# Altium PCB PFCv24.02.PcbDoc
Units mil, origin at the board's own origin, x right, y up, seen from the top; angles counter-clockwise.
Board outline 3770 x 1300 mil, 4 copper layers (Top Layer, Internal Plane 1, Internal Plane 2, Bottom Layer); 95 components, 75 nets, 406 pads, 184 vias.
Unrouted connection lines stored in the file: 1.
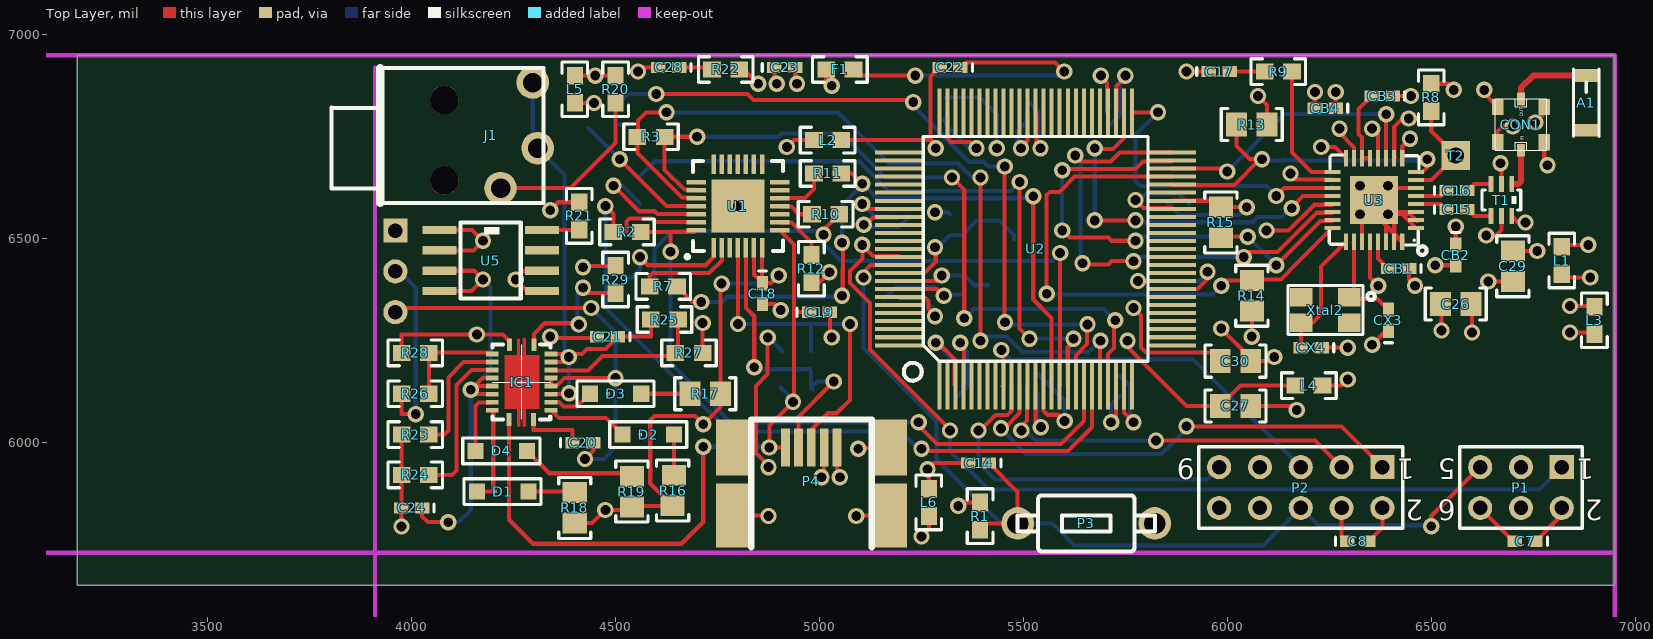
[diagram p0: Top Layer view]
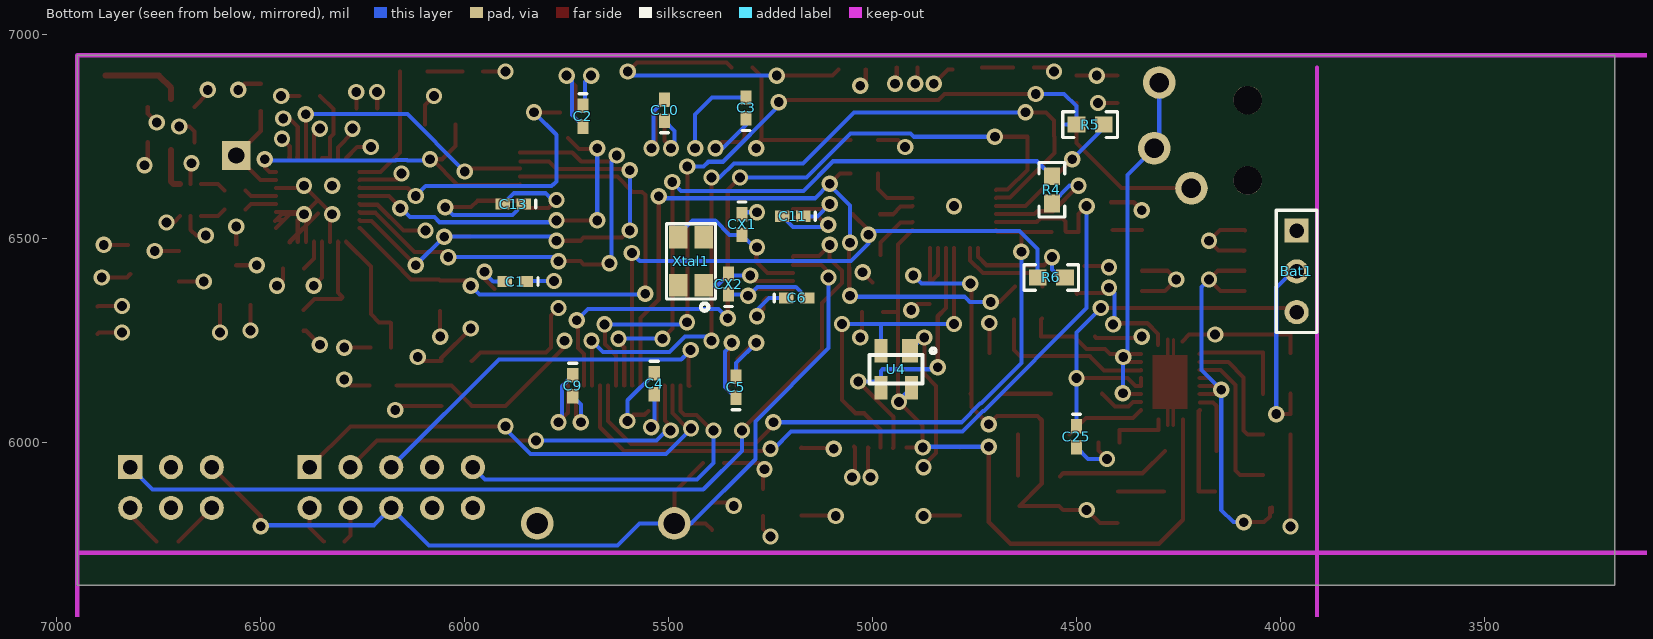
[diagram p1: Bottom Layer view, seen from below]
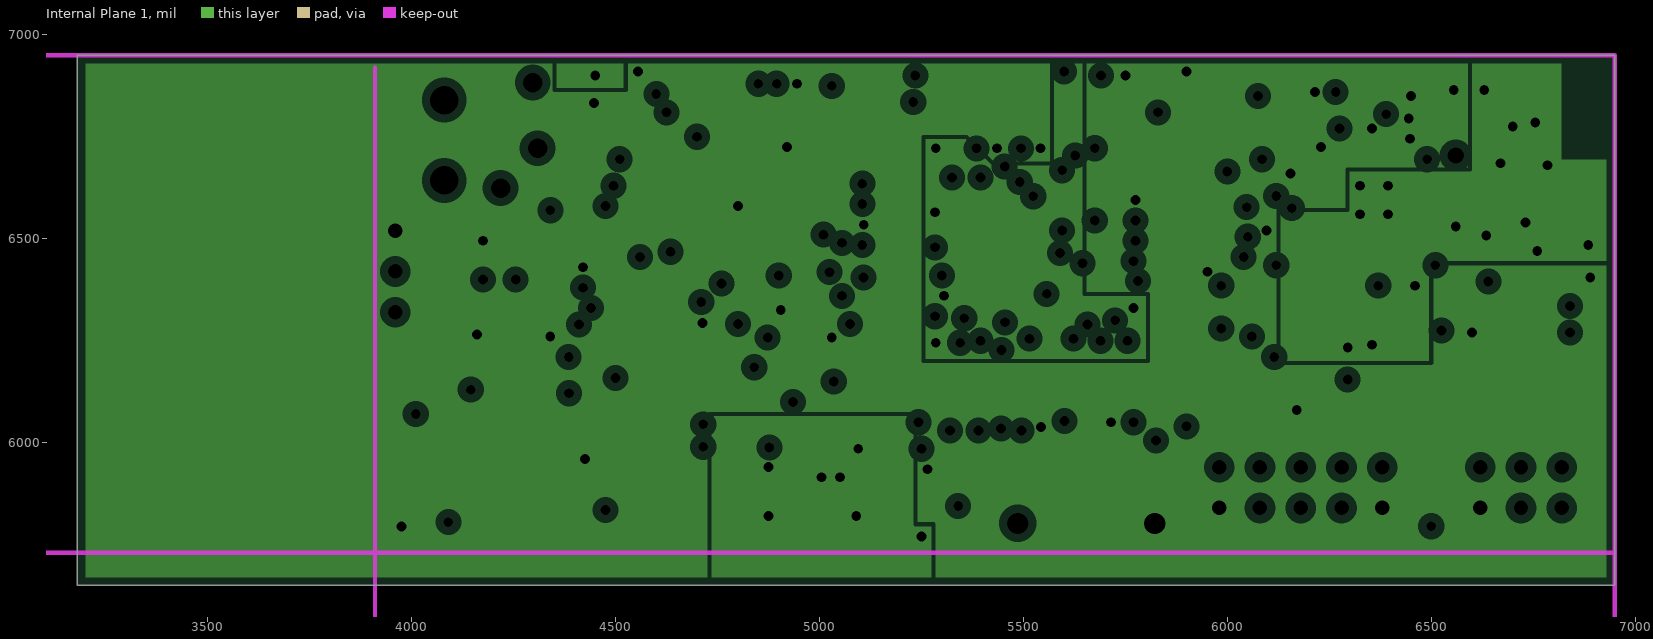
[diagram p2: Internal Plane 1, clearances drawn from the general rule]
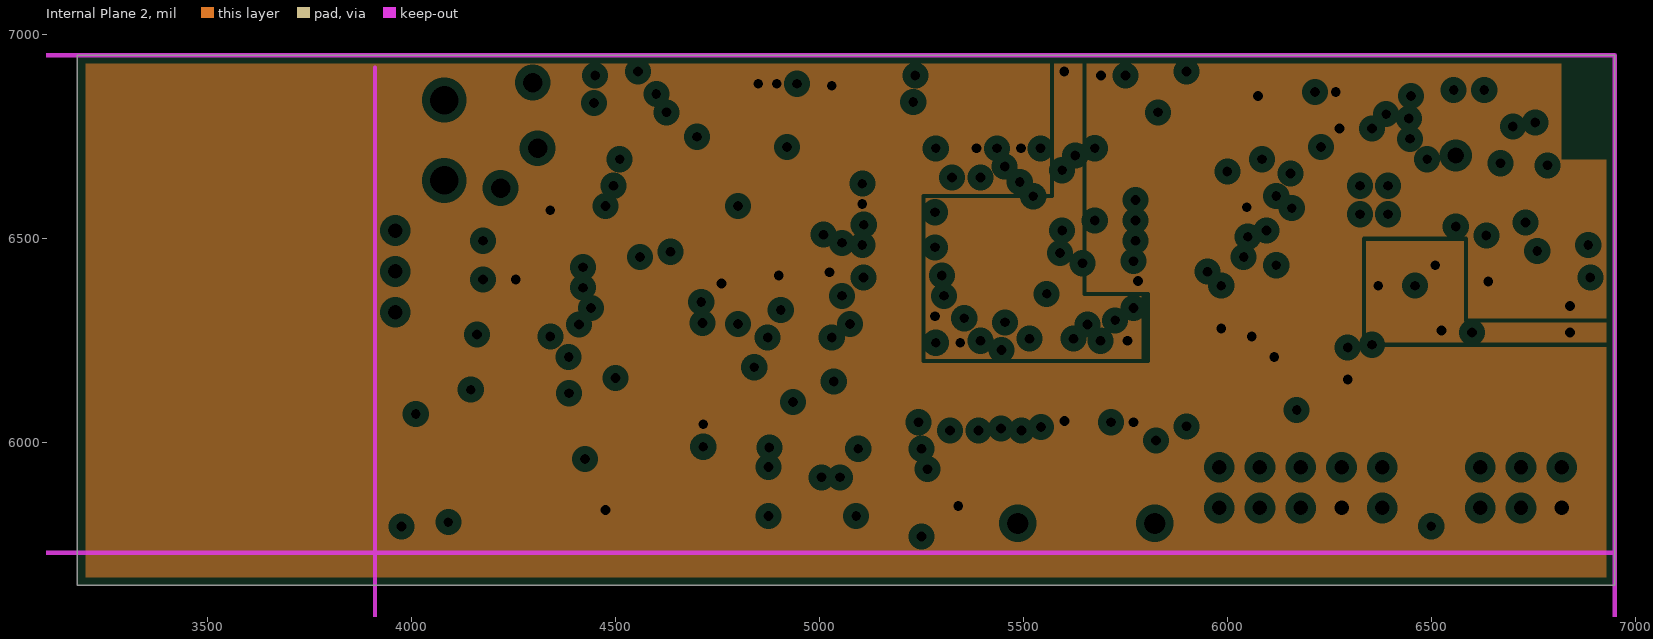
[diagram p3: Internal Plane 2, clearances drawn from the general rule]

## Layer stack, top to bottom
Top Layer: signal copper 1.4
Dielectric: core 12.6, FR-4, Dk 4.8
Internal Plane 1: plane copper 1.4, net (Multiple Nets)
Dielectric: prepreg 12.6, FR-4, Dk 4.8
Internal Plane 2: plane copper 1.4, net (Multiple Nets)
Dielectric: core 12.6, FR-4, Dk 4.8
Bottom Layer: signal copper 1.4

## Board outline
6950,5650 3180,5650 3180,6950 6950,6950 6950,5650

## Design rules (kind name [scope] priority, off if disabled: settings)
Clearance [All] p1: gap=7.87
ComponentClearance [All] p1: gap=10 collisioncheckmode=3 verticalgap=10 showdistances=TRUE
MinimumSolderMaskSliver [All] p1 off: minsoldermaskwidth=3.94
PlaneClearance [All] p1: clearance=20
PlaneConnect [All] p1: planeconnectstyle=Direct reliefexpansion=20 reliefentries=4 reliefconductorwidth=10 reliefairgap=10
PolygonConnect [All] p1: connectstyle=Direct reliefconductorwidth=10 reliefentries=4 polygonreliefangle="90 Angle"
RoutingVias [All] p1: holewidth=15.75 width=35.43 viastyle="Through Hole" minholewidth=15.75 minwidth=35.43 maxholewidth=393.7 maxwidth=393.7
SilkToSilkClearance [All] p1 off: silktosilkclearance=10
SilkscreenOverComponentPads [All] p1 off: minsilkscreentomaskgap=10
SolderMaskExpansion [All] p1: expansion=4
TestPointUsage [All] p1: valid=0 allowmultiple=FALSE
Testpoint [All] p1: side=15 testpointundercomponent=TRUE minsize=40 maxsize=100 preferedsize=60 minholesize=0 maxholesize=40 preferedholesize=32 testpointgrid=1 style=1023 order=0-112345678
Width [All] p1: maxlimit=393.7 minlimit=7.87 preferedwidth=7.87
18 further rules are at their usual default settings.

## Components (designator, comment, footprint, x,y, rotation, side; value= is the part's Value field where it differs from the comment)
A1 "Ant. 2.45G" "ANTENNA CHIP" 6880,6900 r270 top
Bat1 "Batttery" HDR1X3 3960,6520 r270 bottom
C1 "C" 0402 5875.59,6395 r0 bottom
C2 "C" 0402 5710,6800.59 r270 bottom
C3 "C" 0402 5310,6820.59 r90 bottom
C4 "C" 0402 5535,6144.41 r270 bottom
C5 "C" 0402 5335,6135.59 r90 bottom
C6 "C" 0402 5185.59,6355 r180 bottom
C7 "C" 0402 6730,5758 r180 top
C8 "C" 0402 6320,5758 r0 top
C9 "C" 0402 5735,6139.41 r270 bottom
C10 "C" 0402 5510,6815 r90 bottom
C11 "C" 0402 5195.59,6555 r0 bottom
C13 "C" 0402 5880.59,6585 r0 bottom
C14 "C" 0402 5390,5950 r180 top
C15 "C" 0402 6563,6572 r0 top
C16 "C" 0402 6563,6618 r0 top
C17 "C" 0402 5980,6910 r0 top
C18 "C" 0402 4860,6365.59 r270 top
C19 "C" 0402 5000,6320 r0 top
C20 "C" 0402 4420,6000 r0 top
C21 "C" 0402 4480,6260 r180 top
C22 "C" 0402 5320,6920 r180 top
C23 "C" 0402 4915,6920 r0 top
C24 "C" 0402 4000,5840 r180 top
C25 "C" 0402 4500,6014.41 r270 bottom
C26 "100nF_0805" 0805#1 6560,6340 r180 top
C27 "100nF_0805" 0805#1 6020,6090 r180 top
C28 "C" 0402 4630,6920 r180 top
C29 "100nF_0805" 0805#1 6700,6432.6 r270 top
C30 "100nF_0805" 0805#1 6020,6200 r0 top
CB1 "C" 0402 6420,6427 r180 top
CB2 "C" 0402 6560,6460 r270 top
CB3 "C" 0402 6380,6850 r180 top
CB4 "C" 0402 6240,6820 r180 top
CON1 "Conector Antena" "MM8430-2600_Coaxial Connectors" 6720,6780 r90 top
CX1 "C" 0402 5320,6535 r270 bottom
CX2 "C" 0402 5353,6389 r90 bottom
CX3 "C" 0402 6395,6300 r90 top
CX4 "C" 0402 6205.59,6233 r180 top
D1 "Diodo Led" "Diode Led" 4222.99,5880 r180 top
D2 "Diodo Led" "Diode Led" 4580,6020 r180 top
D3 "Diodo Led" "Diode Led" 4500,6120 r180 top
D4 "Diodo Led" "Diode Led" 4220,5980 r180 top
F1 "Ferrita" 0603 5050,6915 r0 top
IC1 "BQ24031" BQ24031 4262.44,6042.36 r90 top
J1 "CAMSHOT" MJ-2509N 3923,6722 r270 top
L1 "22nH_0603" 0603 6820,6446.54 r270 top
L2 "22nH_0603" 0603 5020,6742 r180 top
L3 "22nH_0603" 0603 6900,6300 r270 top
L4 "22nH_0603" 0603 6200,6140 r180 top
L5 "22nH_0603" 0603 4400,6866.54 r270 top
L6 "22nH_0603" 0603 5268,5853.46 r90 top
P1 "Programador" HDR2X3 6820,5940 r180 top
P2 "Programador" HDR2X5 6380,5940 r180 top
P3 "Pulsador" PUSH-BUTTON-W 5486,5802 r0 top
P4 "USB-AB" USB-MINI-AB-SMT 4980,5988 r90 top
R1 "R 0402" 0603 5394,5820 r90 top
R2 "R 0402" 0603 4528,6517 r180 top
R3 "R 0402" 0603 4587,6750 r180 top
R4 "R 0402" 0603 4560,6620 r90 bottom
R5 "R 0402" 0603 4466.54,6780 r0 bottom
R6 "R 0402" 0603 4561.54,6405 r0 bottom
R7 "R 0402" 0603 4617,6383 r0 top
R8 "R 0402" 0603 6500,6846.54 r90 top
R9 "R 0402" 0603 6125,6910 r180 top
R10 "R 0402" 0603 5015,6560 r180 top
R11 "R 0402" 0603 5020,6660 r180 top
R12 "R 0402" 0603 4980,6426.54 r90 top
R13 "16.9kohm-0805" 0805#1 6060,6780 r0 top
R14 "16.9kohm-0805" 0805#1 6060,6360 r270 top
R15 "16.9kohm-0805" 0805#1 5984,6540 r90 top
R16 "16.9kohm-0805" 0805#2 4640,5882.6 r270 top
R17 "16.9kohm-0805" 0805#1 4720,6120 r0 top
R18 "16.9kohm-0805" 0805#1 4400,5840 r270 top
R19 "16.9kohm-0805" 0805#1 4540,5880 r270 top
R20 "R 0402" 0603 4500,6866.54 r90 top
R21 "R 0402" 0603 4411,6556 r90 top
R22 "R 0402" 0603 4770,6915 r0 top
R23 "R 0402" 0603 4008.78,6020 r180 top
R24 "R 0402" 0603 4008.79,5920.89 r180 top
R25 "R 0402" 0603 4620,6302 r180 top
R26 "R 0402" 0603 4008.78,6120 r0 top
R27 "R 0402" 0603 4680,6220 r180 top
R28 "R 0402" 0603 4008.78,6220 r0 top
R29 "R 0402" 0603 4500,6400 r270 top
T1 "BALUN" BALUN 6672,6595 r270 top
T2 "TESTPOINT" TESTPOINT 6560,6704 r0 top
U1 "USB" QFN28_5X5 4800,6580 r90 top
U2 "XMEGA" Quad100 5530,6475 r90 top
U3 "RF TRAN" QFN32_50 6360,6595 r90 top
U4 "TVS" SOT-143 4942,6180 r0 bottom
U5 "TPS77633D" TPS77633D 4120,6540 r270 top
Xtal1 "Xtal TSX-4025" TSX-4025 5445,6445 r90 bottom
Xtal2 "Xtal TSX-4025" TSX-4025 6240,6325 r180 top

## Footprints (in the part's own frame and the unit in brackets; to place one, negate y for a bottom-side part, rotate by r counter-clockwise, add the part's x,y. Pads: shape width x height; smd on the part's side, far side on the other; paste and mask are expansions set on the pad)
0402 [mm] "Chip Capacitor; Body 1.0 x 0.5 mm (LxW typ)"
  rect 0.9x0.7 smd: 1(-0.65,0) 2(0.65,0)
  silkscreen extent -1.4,-0.25 -1.4,0.25
0603 [mm]
  rect 1.1x1 smd: 1(-0.85,0) 2(0.85,0)
  silkscreen extent -1.7,-0.8 1.7,0.8
0805#1 [mm] "Chip Resistor; Body 2.0 x 1.3 mm (LxW typ)"
  rect 1.3x1.5 smd: 1(-0.95,0) 2(0.95,0)
  silkscreen extent -1.9,-1 1.9,1
0805#2 [mm] "Chip Resistor; Body 2.0 x 1.3 mm (LxW typ)"
  rect 1.3x1.5 smd: 1(-0.95,0.076) 2(0.95,0)
  silkscreen extent -1.9,-1 1.9,1
"ANTENNA CHIP" [mm] "ANTENNA CHIP 2.4GHZ"
  rect 0.8x1.6 smd: 1(0,0) 2(3.4,0)
  silkscreen extent -0.4,-0.8 3.8,0.8
BALUN [mm] "FILTER BALUN CER CHIP 2.4GHZ"
  rect 1x0.3 smd: 1(-1,0.65) 2(-1,0) 3(-1,-0.65) 4(1,-0.65) 5(1,0) 6(1,0.65)
  silkscreen extent -0.62,-1.2 0.62,1.2
BQ24031 [mm]
  rect 0.8x0.3 smd: 1(0.37,-0.93) 10(5.02,-0.955) 11(5.02,0.57) 20(0.37,0.595)
  rect 0.3x0.8 smd: 2(0.945,-2.005) 3(1.445,-2.005) 4(1.945,-2.005) 5(2.445,-2.005) 6(2.945,-2.005) 7(3.445,-2.005) 8(3.945,-2.005) 9(4.445,-2.005) 12(4.445,1.645) 13(3.945,1.645) 14(3.445,1.645) 15(2.945,1.645) 16(2.445,1.645) 17(1.945,1.645) 18(1.445,1.645) 19(0.945,1.645)
  Top Layer region: 1.015,-1.299 4.39,-1.299 4.39,0.881 1.015,0.881
  Top Layer lines w0.2: 5.355,0.005 0,0 ; 0,-0.35 5.375,-0.35
  silkscreen extent 0.37,-2 5.03,1.65
"Diode Led" [mm]
  rect 1x1 smd: 1(-1.6,0) 2(1.6,0)
  silkscreen extent -2.4,-0.8 2.4,0.8
HDR1X3 [mm] "Connector; Header; 3 Position"
  rect 1.5x1.5 hole 0.9: 1(0,0)
  round 1.5 hole 0.9: 2(2.54,0) 3(5.08,0)
  silkscreen extent -1.27,-1.27 6.35,1.27
HDR2X3 [mm] "Connector; Header; 3x2 Position"
  rect 1.5x1.5 hole 0.9: 1(0,0)
  round 1.5 hole 0.9: 2(0,2.54) 3(2.54,0) 4(2.54,2.54) 5(5.08,0) 6(5.08,2.54)
  silkscreen extent -1.27,-1.27 6.35,3.81
HDR2X5 [mm] "Connector; Header; 5x2 Position"
  rect 1.5x1.5 hole 0.9: 1(0,0)
  round 1.5 hole 0.9: 2(0,2.54) 3(2.54,0) 4(2.54,2.54) 5(5.08,0) 6(5.08,2.54) 7(7.62,0) 8(7.62,2.54) 9(10.16,0) 10(10.16,2.54)
  silkscreen extent -1.27,-1.27 11.43,3.81
MJ-2509N [mil] "CONN MONO JACK 2.5MM PCB MNT"
  round 80 hole 48: 1(98,295) 2(0,386) 3(-161,374)
  round 70 hole 70: NC(-118,157) NC(79,157)
  silkscreen extent -197,-120 134,400
"MM8430-2600_Coaxial Connectors" [mm]
  rect 0.8x0.5 smd: 1(-1.6,0) 2(1.6,0)
  rect 1x0.7 smd: 3(-1.1,1.45) 4(1.1,1.45) 5(-1.102,-1.45) 6(1.1,-1.45)
  silkscreen extent -1.6,-1.6 1.6,1.6
PUSH-BUTTON-W [mil] "SWITCH TACT 6X3.5MM H=4.3MM"
  round 80 hole 52: 1(0,0) 2(336.22,0)
  silkscreen extent 0,-69 336,69
QFN28_5X5 [mm] "QFN para SiLab CP2102"
  rect 3.3x3.3 smd: 0(0,0)
  rect 1.2x0.28 smd: 1(-2.6,1.5) 2(-2.6,1) 3(-2.6,0.5) 4(-2.6,0) 5(-2.6,-0.5) 6(-2.6,-1) 7(-2.6,-1.5) 15(2.6,-1.5) 16(2.6,-1) 17(2.6,-0.5) 18(2.6,0) 19(2.6,0.5) 20(2.6,1) 21(2.6,1.5)
  rect 0.28x1.2 smd: 8(-1.5,-2.6) 9(-1,-2.6) 10(-0.5,-2.6) 11(0,-2.6) 12(0.5,-2.6) 13(1,-2.6) 14(1.5,-2.6) 22(1.5,2.6) 23(1,2.6) 24(0.5,2.6) 25(0,2.6) 26(-0.5,2.6) 27(-1,2.6) 28(-1.5,2.6)
  silkscreen extent -3.25,-2.8 2.8,3.25
QFN32_50 [mm] "QFN32"
  rect 0.25x1 smd: 1(-1.75,-2.6) 2(-1.25,-2.6) 3(-0.75,-2.6) 4(-0.25,-2.6) 5(0.25,-2.6) 6(0.75,-2.6) 7(1.25,-2.6) 8(1.75,-2.6) 17(1.75,2.6) 18(1.25,2.6) 19(0.75,2.6) 20(0.25,2.6) 21(-0.25,2.6) 22(-0.75,2.6) 23(-1.25,2.6) 24(-1.75,2.6)
  rect 1x0.25 smd: 9(2.6,-1.75) 10(2.6,-1.25) 11(2.6,-0.75) 12(2.6,-0.25) 13(2.6,0.25) 14(2.6,0.75) 15(2.6,1.25) 16(2.6,1.75) 25(-2.6,1.75) 26(-2.6,1.25) 27(-2.6,0.75) 28(-2.6,0.25) 29(-2.6,-0.25) 30(-2.6,-0.75) 31(-2.6,-1.25) 32(-2.6,-1.75)
  rect 3x3 smd: 33(0,0)
  silkscreen extent -3.42,-3.27 2.8,2.8
Quad100 [mm]
  rect 3x0.25 smd: 1(-8.5,6) 2(-8.5,5.5) 3(-8.5,5) 4(-8.5,4.5) 5(-8.5,4) 6(-8.5,3.5) 7(-8.5,3) 8(-8.5,2.5) 9(-8.5,2) 10(-8.5,1.5) 11(-8.5,1) 12(-8.5,0.5) 13(-8.5,0) 14(-8.5,-0.5) 15(-8.5,-1) 16(-8.5,-1.5) 17(-8.5,-2) 18(-8.5,-2.5) 19(-8.5,-3) 20(-8.5,-3.5) 21(-8.5,-4) 22(-8.5,-4.5) 23(-8.5,-5) 24(-8.5,-5.5) 25(-8.5,-6) 51(8.5,-6) 52(8.5,-5.5) 53(8.5,-5) 54(8.5,-4.5) 55(8.5,-4) 56(8.5,-3.5) 57(8.5,-3) 58(8.5,-2.5) 59(8.5,-2) 60(8.5,-1.5) 61(8.5,-1) 62(8.5,-0.5) 63(8.5,0) 64(8.5,0.5) 65(8.5,1) 66(8.5,1.5) 67(8.5,2) 68(8.5,2.5) 69(8.5,3) 70(8.5,3.5) 71(8.5,4) 72(8.5,4.5) 73(8.5,5) 74(8.5,5.5) 75(8.5,6)
  rect 0.25x3 smd: 26(-6,-8.5) 27(-5.5,-8.5) 28(-5,-8.5) 29(-4.5,-8.5) 30(-4,-8.5) 31(-3.5,-8.5) 32(-3,-8.5) 33(-2.5,-8.5) 34(-2,-8.5) 35(-1.5,-8.5) 36(-1,-8.5) 37(-0.5,-8.5) 38(0,-8.5) 39(0.5,-8.5) 40(1,-8.5) 41(1.5,-8.5) 42(2,-8.5) 43(2.5,-8.5) 44(3,-8.5) 45(3.5,-8.5) 46(4,-8.5) 47(4.5,-8.5) 48(5,-8.5) 49(5.5,-8.5) 50(6,-8.5) 76(6,8.5) 77(5.5,8.5) 78(5,8.5) 79(4.5,8.5) 80(4,8.5) 81(3.5,8.5) 82(3,8.5) 83(2.5,8.5) 84(2,8.5) 85(1.5,8.5) 86(1,8.5) 87(0.5,8.5) 88(0,8.5) 89(-0.5,8.5) 90(-1,8.5) 91(-1.5,8.5) 92(-2,8.5) 93(-2.5,8.5) 94(-3,8.5) 95(-3.5,8.5) 96(-4,8.5) 97(-4.5,8.5) 98(-5,8.5) 99(-5.5,8.5) 100(-6,8.5)
  silkscreen extent -8.21,-7 7,8.21
SOT-143 [mm] "SOT143"
  rect 1x1.45 smd: 1(-0.85,-1.15)
  rect 0.8x1.45 smd: 2(0.95,-1.15) 3(0.95,1.15) 4(-0.95,1.15)
  silkscreen extent -2.45,-1.3 1.65,0.9
TESTPOINT [mm] "Punto de test"
  rect 1.8x1.8 hole 1: 1(0,0)
TPS77633D [mm]
  rect 0.51x2.116 smd: 1(0.467,-1.312) 2(1.737,-1.312) 3(3.007,-1.312) 4(4.277,-1.312) 5(4.277,5.058) 6(3.007,5.058) 7(1.737,5.058) 8(0.467,5.058)
  silkscreen extent 0,0 4.75,3.75
TSX-4025 [mm] "Xtal 16Mhz"
  rect 1.4x1.15 smd: 1(-1.5,-0.8) 2(1.5,-0.8) 3(1.5,0.8) 4(-1.5,0.8)
  silkscreen extent -3.09,-1.52 2.33,1.53
USB-MINI-AB-SMT [mm] "Conector MINI-USB-AB-SMT"
  rect 2.35x0.55 smd: D+(0,0) D-(0,0.8) ID(0,-0.8) UGND(0,-1.6) VBUS(0,1.6)
  rect 4x2.05 smd: shield(-4.225,-4.925) shield(-4.225,4.925)
  rect 3.5x2.05 smd: shield(0,4.925) shield(0,-4.925)
  silkscreen extent -6.2,-3.75 1.75,3.75

## Part data
A1: library part 2450AT18A100, "ANTENNA CHIP 2.4GHZ"
Bat1: library part "Header 3", "Header, 3-Pin"
C1 C2 C3 C4 C5 C6 C7 C8 C9 C10 C11 C13 C14 C15 C16 C17 C18 C19 C20 C21 C22 C23 C24 C25 C28 CB1 CB2 CB3 CB4 CX1 CX2 CX3 CX4: "CONDENSADOR"
C26 C27 C29 C30: "CAP CER 100PF 630V X7R 0805"
CON1: library part "CON ANT-MM8430-2600RA1", "CONN MW COAXIAL WITH SWITCH"
D1 D2 D3 D4: library part LTST-C230CKT, "Typical INFRARED GaAs LED"
F1: library part BLM21AH102SN1, "Chip Ferrite Beads"
IC1: "IC PWR MANAGEMENT SYSTEM 20-QFN"
J1: library part MJ-2509N_1, "CONN MONO JACK 2.5MM PCB MNT"
L1 L2 L3 L4 L5 L6: "CER INDUCTOR 22NH 0603"
P1: library part "Header 3X2", "Header, 3-Pin, Dual row"
P2: library part "Header 5X2", "Header, 5-Pin, Dual row"
P3: library part PUSHBUTTON, "SWITCH TACT 6X3.5MM H=4.3MM 180G"
P4: library part WM1722, "CONN RECEPT USB 5POS RT ANG SMD"
R1 R2 R3 R4 R5 R6 R7 R8 R9 R10 R11 R12 R20 R21 R22 R23 R24 R25 R26 R27 R28 R29: "RESISTENCIA 0402 SMD"
R13 R14 R15 R16 R17 R18 R19: "RES 16.9K OHM 1/8W 1% 0805 SMD"
T1: library part 2450FB39B100E, "FILTER BALUN CER CHIP 2.4GHZ"
T2: "Punto de Test"
U1: library part CP2102, "IC USB-TO-UART BRIDGE 28MLP"
U2: library part ATXMEGA64A1, "MCU AVR 64K FLASH 1.6V 100-TQFP"
U3: library part AT86RF231, "IC TXRX ZIGBEE/802.15.4 32QFN"
U4: library part SP0503BAHTG, "TVS AVAL DIODE ARRAY 3 CH SOT143"
U5: "IC 3.3V 500MA LDO REG 8-SOIC"
Xtal1 Xtal2: "Cristal 16Mhz"

## Via types
v1: diameter 40, hole 24, Top Layer to Bottom Layer, 183 vias
v2: diameter 40, hole 24, Top Layer to Bottom Layer, tented bottom, 1 vias

## Nets (pads, with @x,y where several pads share a name; then routed paths per layer and width w, separated by ;. In a path a pad name is that pad's centre, name@x,y a point inside that pad or via, vN(x,y) a via of type N, cw(c..) or ccw(c..) an arc to the next point about the centre after c; other vN are vias at no path point)
A-GND: C5.2 C6.2 C22.2 C30.1 CX1.1 CX2.1 L2.1 U2.3 U2.93 | length 1344.6
  Top Layer w10: L2.1 5269.13,6742 ; U2.93 5288.41,6376.59 v1(5305,6360) ; v1(5285,6721.65) 5285,6732.13 5272.13,6745 5272.13,6897.72 C22.2 ; v1@5291.01,6245 5331.27,6204.74 5331.27,6142.24 U2.3 ; v1(5770,6330) 5787.87,6312.13 5787.87,6233.38 5800.26,6221 5961.6,6221 C30.1
  Bottom Layer w10: C6.2 C6.2@5165,6360 ; C6.2@5161.48,6355 5188.13,6381.65 5281.86,6381.65 v1@5303.51,6360 ; v1(5283,6565) 5315.59,6565 CX1.1 ; v1(5285,6245) 5335,6195 C5.2 ; v1(5305,6360) v1@5303.51,6360 ; CX2.1 5306.92,6363.41 v1@5303.51,6360
A-VCC: C5.1 C6.1 C22.1 C27.2 F1.2 L4.2 U2.4 U2.94 | length 1745.7
  Top Layer w10: F1.2 5098.46,6900 v1(5235,6900) ; U2.94@5197.24,6355.01 5259.74,6355.01 5267.28,6347.47 5267.28,6327.72 v1@5285,6310 ; C22.1 5357.72,6932.13 5577.87,6932.13 v1(5600,6910) ; U2.4 5354.73,6142.24 v1@5354.73,6230 ; v1(5755,6250) 5755,6235 5900,6090 C27.2 6032.6,6140 L4.2
  Bottom Layer w10: C6.1 5254.16,6355 5285,6324.16 v1@5285,6310 ; v1(5235,6900) 5590,6900 v1(5600,6910) ; C5.1 5361.65,6136.65 5361.65,6223.35 v1@5355,6230
  other v1: 5345,6245 5283,6310
D+: P4.D+ U1.4 U4.2 | length 866.5
  Top Layer w10: v1(4800,6291) U1.4 ; P4.D+ 4980,6031.8 5020.33,6072.13 5042.13,6072.13 5075,6105 v1@5075,6275
  Bottom Layer w10: v1(4800,6291) 4979.4,6291 ; U4.2 4979.4,6291 ; v1(5075,6291) 4979.4,6291
D-: P4.D- U1.5 U4.3 | length 745.5
  Top Layer w10: U1.5 4819.68,6330.32 4840,6310 v1(4840,6185) ; P4.D-@4950,5986.5 P4.D- 4948.5,6063.5 v1(5035,6150)
  Bottom Layer w10: v1@4845,6180 4975,6180 4979.4,6175.6 U4.3 ; U4.3@4983.31,6130.82 U4.3 ; v1(5035,6150) 4994.68,6150 U4.3
DC-GND: L5.1 R20.2 | length 100
  Top Layer w10: L5.1 R20.2
  other v1: 4450,6900
GND: Bat1.1 C1.2 C2.2 C3.2 C4.2 C7.2 C8.2 C9.2 C10.2 C11.2 C13.2 C14.2 C17.1 C18.2 C19.2 C20.2 C21.2 C23.2 C24.2 C25.2 C26.1 C27.1 C28.2 CB3.1 CB4.2 IC1.11 L1.2 L2.2 L5.2 L6.2 P1.6 P2.2 P2.10 P3.2 R8.2 R23.2 R24.2 R27.1 R28.1 R29.1 U1.0 U2.13 U2.23 U2.33 U2.43 U2.53 U2.63 U2.73 U2.84 U3.9 U3.10 U3.12 U3.16 U3.18 U3.21 U5.1 U5.2 | length 4563.1
  Top Layer w10: v1(3975.32,5794.68) R24.2 R23.2 ; R28.1 3975.32,6265.32 v1@4159.68,6265.32 ; U5.1@4086.75,6520 4088.35,6521.59 4148.41,6521.59 v1(4175,6495) 4151.59,6471.59 4088.35,6471.59 U5.2@4089.94,6470 ; v1(4160,6265) 4223.51,6265 IC1.11@4240,6248.51 ; v1(4340,6260) 4342.87,6257.13 4451.54,6257.13 C21.2 ; L5.2 v1(4446.93,6833.07) ; v1(4420,6430) 4423.46,6433.46 4480,6433.46 ; v1(4425,5960) 4445.59,5980.59 C20.2 ; v1@4560,6905 v1(4555,6910) 4565,6920 C28.2 C28.2@4590,6920 ; R27.1 v1(4713.46,6293.46) ; C18.2 4890,6340 v1(4905,6325) ; v1(4920,6725) 4937,6742 L2.2 ; C23.2 4940.59,6884.41 v1(4945,6880) ; C19.2 5025.59,6264.41 v1@5030,6260 ; v1(5108.43,6534.28) 5110.67,6532.03 5111.14,6532.03 5130.97,6551.86 5193.46,6551.86 U2.84 ; L6.2 5268,5932 v1(5265,5935) 5280,5950 C14.2 ; U2.13 5530.01,6051.99 5542.87,6039.13 v1(5542.87,6038.19) ; U2.63 5531.9,6807.76 5531.9,6726.41 v1@5536.65,6721.65 ; v1(5715,6050) 5726.86,6061.86 U2.23 ; U2.53 5728.75,6811.54 5728.75,6874.03 5750,6895.28 v1(5750,6900) ; v1(5775,6595) 5794.75,6575.25 U2.43@5862.83,6575.25 ; v1(5900,6910) C17.1 ; 5927.14,6376.59 5951.57,6401.02 v1(5951.57,6419.28) ; C27.1 6160,6090 v1(6170,6080) ; v1@6100,6520 6150,6520 6213.35,6583.35 6255.83,6583.35 U3.21 ; v1(6155,6660) 6155,6655 6165,6645 6256.85,6645 U3.18 ; CB4.2 v1@6214.41,6859.41 ; v1(6230,6725) 6263.46,6725 U3.16 ; C8.2 6380,5792.41 P2.2 ; v1(6355,6770) 6369.84,6755.16 U3.12 ; CB3.1 v1(6450,6850) ; U3.10@6410.59,6698.74 U3.10 6409.21,6774.21 6430,6795 v1(6445,6795) ; U3.9@6431.18,6699.65 U3.9 6428.9,6725.9 v1(6448,6745) ; R8.2 6540,6880 v1(6555,6865) ; v1(6600,6270) C26.1@6600,6337.4 ; P1.6 C7.2@6702,5758 ; L1.2 6828.07,6405 v1(6890,6405)
  Bottom Layer w10: v1(4425,5960) 4471.18,5960 C25.2 ; v1(5108.43,6534.28) 5108.43,6530.74 5110.81,6528.35 5194.53,6528.35 C11.2 ; C3.2@5310,6844.7 C3.2 5393.82,6846.18 5435,6805 v1(5435,6721.65) ; C10.2 5510,6839.11 5536.65,6812.46 5536.65,6727 v1(5542,6721.65) ; C4.2 5535,6047 5542.87,6039.13 v1(5542.87,6038.19) ; C2.2@5710,6776.48 5736.65,6803.13 5736.65,6886.65 v1(5750,6900) ; v1(5715,6050) 5715,6093.82 C9.2 ; v1(5775,6595) 5785,6595 5801.65,6611.65 5879.53,6611.65 C13.2 ; C1.2 5930,6395 v1@5951.57,6416.57
  other v1: 5030,6258 6096,6520 4800,6580 6215,6860
IRQ: R14.1 U2.47 U3.24 | length 1322.2
  Top Layer w10: v1@5557.13,6365 5557.13,6527.13 5557.13,6607.13 5565,6615 5588.49,6615 5625.67,6652.18 5682.18,6652.18 U2.47 ; v1(5985,6385) 5997.4,6397.4 R14.1 6062.78,6400.18 6131.67,6400.18 6152.87,6421.38 6152.87,6422.17 6256.81,6526.1 U3.24
  Bottom Layer w10: v1@5571.6,6363.4 5963.4,6363.4 v1(5985,6385)
  other v1: 5557,6365
ISET2: IC1.7 R25.1 R27.2 | length 408.1
  Top Layer w10: IC1.7 4342.24,6177.13 4432.4,6177.13 4467.4,6212.13 4638.66,6212.13 4653.46,6226.93 R25.1
NetA1_1: A1.1 CON1.2 | length 199.4
  Top Layer w14.96: CON1.2 6720,6870 6750,6900 A1.1
NetBat1_2: Bat1.2 R26.1 | length 455.9
  Top Layer w10: R26.1@3975,6120 R26.1 3975.32,6070.32 v1@4009.68,6070.32
  Bottom Layer w10: Bat1.2 3970,6420 4010,6380 v1@4010,6075
  other v1: 4010,6070
NetBat1_3: Bat1.3 C25.1 IC1.5 IC1.6 | length 990.5
  Top Layer w10: Bat1.3 3970,6330 v1(4440,6330) ; IC1.6 IC1.5 4355.31,6138.62 4375,6158.31 v1(4500,6158.31)
  Bottom Layer w10: Bat1.3@3955,6320 Bat1.3 ; v1(4440,6330) 4500,6270 v1(4500,6158.31) C25.1
NetC15_1: C15.1 U3.4 | length 80.5
  Top Layer w10: U3.4 6524.25,6585.16 C15.1
NetC15_2: C15.2 T1.4 | length 64.9
  Top Layer w10: C15.2 6588.59,6571.41 6604.37,6555.63 T1.4
NetC16_1: C16.1 U3.5 | length 80.5
  Top Layer w10: U3.5 6524.25,6604.84 C16.1
NetC16_2: C16.2 T1.3 | length 64.6
  Top Layer w10: C16.2 6604.96,6634.37 T1.3
NetC17_2: C17.2 R9.2 | length 85.9
  Top Layer w10: C17.2 R9.2
NetC20_1: C20.1 IC1.1 | length 152.1
  Top Layer w10: IC1.1 4299.06,6030.94 4394.06,6030.94 4394.41,6030.59 C20.1
NetC24_1: C24.1 IC1.15 IC1.16 IC1.17 U5.3 U5.4 | length 1131.1
  Top Layer w10: C24.1@4020.44,5830.12 4020.88,5840.21 C24.1@4020.91,5840.89 ; C24.1 4025.59,5819.41 4040,5805 v1(4090,5805) ; U5.4@4088.35,6371.59 4146.59,6371.59 v1(4175,6400) 4153.41,6421.59 U5.3@4088.35,6421.59 ; IC1.17 4156.06,6118.94 v1(4145,6130) v1@4153.62,6138.62 ; IC1.16 v1@4153.62,6138.62 ; IC1.15 4173.31,6158.31 v1@4153.62,6138.62
  Bottom Layer w10: v1(4090,5805) 4115,5805 4145,5835 v1(4145,6130) 4192.87,6177.87 4192.87,6382.13 v1(4175,6400) v1@4175,6390
NetC28_1: C28.1 R22.1 | length 75.9
  Top Layer w10: C28.1 R22.1@4731.54,6920
NetCB1_2: CB1.2 U3.29 | length 75.8
  Top Layer w10: U3.29 6369.84,6451.57 CB1.2
NetCB3_2: CB3.2 U3.13 U3.14 | length 189.2
  Top Layer w10: U3.13 U3.14 6330.47,6748.04 6322.13,6756.38 6322.13,6817.72 CB3.2
NetCON1_1: CON1.1 T1.1 | length 101.7
  Top Layer w14.96: T1.1 6714.37,6634.37 6720,6640 CON1.1
NetCX1_2: CX1.2 U2.91 Xtal1.3 | length 377.1
  Top Layer w10: U2.91 5257.85,6415.96 5285,6443.11 v1@5285,6480
  Bottom Layer w10: v1@5289.59,6479 CX1.2 5350.45,6509.41 5385.53,6544.49 5441.47,6544.49 5476.5,6509.47 Xtal1.3 Xtal1.3@5476.5,6498.64
  other v1: 5283,6479
NetCX2_2: CX2.2 U2.92 Xtal1.1 | length 238.8
  Top Layer w10: U2.92 5286.27,6396.27 v1(5300,6410)
  Bottom Layer w10: v1@5305,6410 v1(5300,6410) 5356.11,6410 5380.17,6385.94 Xtal1.1
NetCX3_2: CX3.2 U3.26 Xtal2.1 | length 252.3
  Top Layer w10: U3.26@6309.01,6490.86 U3.26 6310.79,6368.23 6305,6362.44 Xtal2.1 6303.43,6352.13 6368.46,6352.13 CX3.2
NetCX4_2: CX4.2 U3.25 Xtal2.3 | length 321.4
  Top Layer w10: CX4.2@6180.94,6233 Xtal2.3 6182.44,6295 6210,6295 6230,6315 6230,6431.54 U3.25
NetD1_1: D1.1 R18.1 | length 111.4
  Top Layer w10: D1.1 R18.1@4397.4,5880
NetD1_2: D1.2 IC1.19 | length 240.5
  Top Layer w10: D1.2 4200,5880 4200,6077.24 IC1.19
NetD2_1: D2.1 R16.1 | length 100
  Top Layer w10: R16.1 D2.1
NetD2_2: D2.2 IC1.2 | length 200.3
  Top Layer w10: IC1.2 4360.94,6060 4477.01,6060 D2.2
NetD3_1: D3.1 R17.1 | length 119.6
  Top Layer w10: D3.1 R17.1
NetD3_2: D3.2 IC1.3 | length 113.3
  Top Layer w10: IC1.3 4361.55,6099.25 4372.53,6088.27 4405.28,6088.27 D3.2
NetD4_1: D4.1 R19.1 | length 282.9
  Top Layer w10: D4.1 4337.99,5925 4532.4,5925 R19.1
NetD4_2: D4.2 IC1.18 | length 153.5
  Top Layer w10: D4.2 4157.01,6090.52 4164.84,6098.35 IC1.18@4196.77,6098.35
NetIC1_10: IC1.10 R29.2 | length 332.9
  Top Layer w10: IC1.10 4300.04,6266.53 4326.38,6292.87 4407.13,6292.87 v1(4410,6290) ; v1(4420,6380) 4433.46,6366.54 R29.2 R29.2@4498.46,6365
  Bottom Layer w10: v1(4410,6290) 4407.13,6292.87 4407.13,6367.13 v1(4420,6380)
NetIC1_13: IC1.13 R23.1 | length 305.5
  Top Layer w10: R23.1 4080,6020 4090,6030 4090,6160 4127.68,6197.68 IC1.13 IC1.13@4197.48,6197.87
NetIC1_14: IC1.14 R24.1 | length 386.5
  Top Layer w10: R24.1@4044.03,5920.89 R24.1 4099.11,5920.89 4110,5931.78 4110,6141.49 4146.5,6177.99 IC1.14
NetJ1_1: J1.1 R20.1 | length 426
  Top Layer w10: J1.1 4389,6624 4500,6735 R20.1
NetR4_1: R4.1 U1.26 | length 314.5
  Top Layer w10: v1(4495,6630) 4557.57,6567.43 4595.85,6567.43 4602.97,6560.32 U1.26
  Bottom Layer w10: v1(4495,6630) 4516.54,6630 R4.1
NetR5_1: R5.1 U1.25 | length 344.1
  Top Layer w10: v1(4510,6695) 4625,6580 U1.25
  Bottom Layer w10: R5.1@4433.07,6771.93 v1(4510,6695)
NetR6_1: R6.1 U1.1 | length 289.8
  Top Layer w10: v1(4560,6455) 4580,6435 4720,6435 4740.94,6455.94 U1.1
  Bottom Layer w10: R6.1 4540,6405 4560,6425 v1(4560,6455)
NetR7_1: R7.1 U1.2 | length 249.3
  Top Layer w10: R7.1 4583.54,6408.54 4590.56,6415.56 4729.44,6415.56 4760.63,6446.75 U1.2
NetR8_1: R8.1 T2.1 U3.7 | length 256.3
  Top Layer w10: U3.7 6500.21,6644.21 T2.1 6500,6764 R8.1
NetR9_1: R9.1 U3.17 | length 317.4
  Top Layer w10: R9.1 6158.46,6711.54 6206.1,6663.9 U3.17
NetR10_2: R10.2 U1.11 | length 87.5
  Top Layer w10: U1.11 4903.66,6578.7 4931.32,6578.7 4950.02,6560 R10.2
NetR11_2: R11.2 U1.12 | length 131.7
  Top Layer w10: U1.12 4964.68,6599.68 4986.54,6621.54 R11.2
NetR12_2: R12.2 U1.9 | length 129
  Top Layer w10: U1.9 4903.66,6539.33 4931.32,6539.33 4980,6490.65 R12.2
NetR21_1: R21.1 U5.8 | length 71.9
  Top Layer w10: U5.8@4339.13,6521.59 R21.1@4411,6521.59
NRST: R13.1 U2.46 U3.8 | length 817.2
  Top Layer w10: U2.46@5864.72,6632.41 U2.46 5865.01,6632.13 6017.13,6632.13 6080,6695 6055,6695 6022.6,6727.4 R13.1 ; U3.8 6478.9,6663.9 6490,6675 v1(6490,6695)
  Bottom Layer w10: v1@6087.87,6692.13 6140.64,6692.13 6141.38,6692.87 6168.62,6692.87 6169.36,6692.13 v1@6487.13,6692.13
  other v1: 6085,6695
NSEL: R15.1 U2.49 U3.23 | length 1265.7
  Top Layer w10: v1(5595,6520) 5596.62,6520 5613.74,6502.87 5708.62,6502.87 5716.49,6495 v1(5775,6495) ; v1@5598.25,6671.25 5774.31,6671.25 5792.8,6689.74 U2.49@5862.83,6689.74 ; R15.1@5986.4,6505 v1(6050,6505) ; v1@6120,6435.28 6228.7,6543.98 6255.83,6543.98 U3.23
  Bottom Layer w10: v1(5595,6520) 5595,6505 v1(5595,6668) ; v1(5775,6495) 5785,6505 v1(6050,6505) v1(6120,6435)
PIN9: P2.5 U2.9 | length 954.9
  Top Layer w10: v1(5445.95,6227.28) 5448.05,6227.28 5451.27,6224.07 U2.9 U2.9@5449.38,6138.46
  Bottom Layer w10: v1@5449.07,6224.07 v1@5449.17,6224.07 ; P2.5 5915.75,6204.25 5468.98,6204.25 v1@5449.17,6224.07 ; v1@5449.17,6224.07 5451.27,6224.07 5448.05,6227.28 v1(5445.95,6227.28) v1@5449.17,6224.07
PIN10: P2.9 U2.10 | length 862.3
  Top Layer w10: v1(5390,6030) 5393.51,6030 5431.38,6067.87 5460.97,6067.87 5470.95,6077.86 U2.10
  Bottom Layer w10: v1(5390,6030) 5390,5950 5430,5910 5950,5910 P2.9
PIN11: P2.1 U2.11 | length 1164.4
  Top Layer w10: v1(5445,6035) 5453.38,6035 5490.64,6072.26 U2.11 ; v1(5900,6040) 6280,6040 P2.1
  Bottom Layer w10: v1(5445,6035) 5445,6033.51 5506.38,5972.13 5838.62,5972.13 5900,6033.51 v1(5900,6040)
PIN12: P2.3 U2.12 | length 939
  Top Layer w10: v1(5495,6030) 5495,6040 5509.13,6054.13 5509.13,6139.16 U2.12 ; v1(5825,6005) 6215,6005 P2.3
  Bottom Layer w10: v1(5495,6030) 5504.57,6030 5529.26,6005.31 5824.69,6005.31 v1(5825,6005)
PIN15: R7.2 R11.1 U2.15 | length 1705.6
  Top Layer w10: R7.2 4688.46,6345 v1(4710,6345) ; R11.1 5080,6660 v1(5105,6635) ; v1(5055,6360) 5057.87,6362.87 5057.87,6383.23 5057.13,6383.98 5057.13,6428.9 5057.87,6429.64 5057.87,6487.13 v1(5055,6490) ; v1(5524.13,6604.13) 5524.13,6351.38 5569.38,6306.13 U2.15
  Bottom Layer w10: v1(4710,6345) 4761.49,6345 4774.36,6357.87 5052.87,6357.87 v1(5055,6360) ; v1(5055,6490) 5055,6581.49 5105,6631.49 v1(5105,6635) 5140.75,6599.25 5519.25,6599.25 v1(5524.13,6604.13)
PIN16: R6.2 R10.1 U2.16 | length 1525.2
  Top Layer w10: v1(5010,6510) 5010,6521.54 R10.1 ; U2.16 5590,6141.29 v1(5590,6465)
  Bottom Layer w10: R6.2 4595,6474.49 4640,6519.49 5000.51,6519.49 v1(5010,6510) 5010,6488.51 5052.76,6445.75 5570.75,6445.75 v1(5590,6465)
PIN17: R4.2 U2.17 | length 1614.1
  Top Layer w10: v1@5490.98,6642.69 5490.98,6649.98 v1(5491,6639) 5490,6639.41 5490,6280 v1(5515,6255) ; U2.17 5608.75,6233.75 v1@5630,6255
  Bottom Layer w10: R4.2 4596.54,6690 5096.49,6690 5169.36,6617.13 5469.13,6617.13 5474.13,6622.13 ; v1(5515,6255) v1@5630,6255
  other v1: 5623,6255
PIN18: R5.2 U2.18 | length 1915.1
  Top Layer w10: v1(4600,6855) 4823.51,6855 4838.51,6840 5225,6840 v1(5230,6835) ; v1(5454,6677) 5454,6289 5455,6290 v1(5455,6295) ; U2.18 5628.43,6213.94 5655.87,6241.38 v1@5655.87,6288.87
  Bottom Layer w10: 4530,6780 R5.2 4500,6825 4530,6855 v1(4600,6855) v1@4580,6855 ; v1(5230,6835) 5230,6825.3 5366.52,6688.78 5402.71,6688.78 5414.49,6677 v1(5454,6677) ; v1@5445,6290 v1(5657,6290) 5657.87,6290 v1@5662.87,6295
PIN19: R2.1 U1.28 U2.19 | length 1669.8
  Top Layer w10: R2.1 4635,6517 ; v1(4635,6468) 4635,6517 ; U1.28 4693.69,6517 4635,6517 ; v1(5243,6050) 5243,6042 5287.87,5997.13 5592.13,5997.13 5648.12,6053.12 U2.19
  Bottom Layer w10: v1(4635,6468) 4635,6195.28 4734.53,6095.75 4736.02,6095.75 4781.77,6050 v1(5243,6050)
PIN20: R2.2 U1.27 U2.20 | length 2004.9
  Top Layer w10: v1(4475,6580) 4494.54,6560.46 R2.2 4525,6517 4526.94,6518.94 4526.94,6542.02 4534.48,6549.56 4588.45,6549.56 4597.38,6540.63 U1.27 ; v1@5265,5985 5270.75,5979.25 5609.25,5979.25 5667.8,6037.8 U2.20 U2.20@5667.87,6140.29
  Bottom Layer w10: v1(4475,6580) 4475,6330 4727.13,6077.87 4728.62,6077.87 4779.36,6027.13 5200,6027.13 5242.13,5985 v1(5250,5985)
PIN21: R3.2 U1.24 U2.21 | length 2021.3
  Top Layer w10: v1(4625,6810) 4575,6810 4555,6790 4555,6751.46 R3.2 4553.54,6710.54 4663.09,6600.98 4696.34,6600.98 U1.24 ; v1(5395,6250) v1(5395,6650) ; U2.21 v1@5687.49,6250
  Bottom Layer w10: v1(4625,6810) 5045,6810 5170,6685 5340,6685 5375,6650 v1(5395,6650) ; v1(5395,6250) 5405.16,6260.16 5459.56,6260.16 5497.6,6222.13 5661.13,6222.13 v1(5689,6250) ; v1@5400,6248.51 v1@5400,6250
PIN22: R3.1 U1.23 U2.22 | length 1846.8
  Top Layer w10: U1.23 4696.34,6620.67 4668.68,6620.67 4620.46,6668.89 R3.1 v1(4700,6750) ; v1(5325,6650) 5355,6620 v1(5355,6305) ; U2.22 5707.17,6217.17 5722.13,6232.13 5722.13,6297.13 v1(5725,6300)
  Bottom Layer w10: v1(4700,6750) 4898.51,6750 4906.38,6757.87 5053.89,6757.87 5161.77,6650 v1(5325,6650) ; v1(5355,6305) 5377.87,6327.87 5697.13,6327.87 v1(5725,6300)
PIN48: U2.48 U3.11 | length 694
  Top Layer w10: U2.48 5993.14,6671.86 v1(6000,6665) ; U3.11 v1(6389.53,6805.47)
  Bottom Layer w10: v1(6000,6665) 6140.47,6805.47 v1(6389.53,6805.47)
PIN50: U2.50 U3.22 | length 1172
  Top Layer w10: v1(5627.13,6704.13) 5642.13,6689.13 5714.13,6689.13 5736.23,6711.23 U2.50 ; v1(5645,6440) 5647.87,6437.13 5708.62,6437.13 5716.49,6445 v1(5770,6445) ; v1(6040,6455) 6052.87,6467.87 6123.15,6467.87 6218.94,6563.66 6255.83,6563.66 U3.22
  Bottom Layer w10: v1@5640,6690 5640,6445 v1(5645,6440) ; v1(5770,6445) 5780,6455 v1(6040,6455)
PIN51: U2.51 U3.19 | length 762.1
  Top Layer w10: U2.51@5766.58,6810 v1(5830,6810) ; v1(6120,6605) 6139.53,6624.53 U3.19 U3.19@6257.17,6625
  Bottom Layer w10: v1(5830,6810) 5775,6755 5775,6640 5782.13,6632.87 5783.62,6632.87 5786.96,6629.53 6095.47,6629.53 v1(6120,6605)
PIN52: U2.52 U3.20 | length 869.1
  Top Layer w10: v1(5675,6545) v1(5775,6545) ; v1@5675,6720 5719.4,6720 5746.54,6747.15 ; v1@6161,6580 6186,6605 6257.48,6605 U3.20
  Bottom Layer w10: v1(5675,6545) v1@5675,6720 ; v1(5775,6545) 5779.53,6540.47 6061.96,6540.47 6074.36,6552.87 6133.87,6552.87 v1@6161,6580
  other v1: 6158,6575 5675,6722
PIN89: P1.1 U2.89 | length 2285.6
  Top Layer w10: v1(5105,6485) v1@5105,6483.18 ; v1(5320,6030) 5320,6031.96 5123.43,6228.54 5123.43,6342.96 5075,6391.38 5075,6421.49 5105,6451.49 v1@5105,6483.18 ; v1@5105,6483.18 5130.97,6457.22 U2.89@5193.46,6457.22 ; U2.89@5193.46,6457.22 U2.89 U2.89@5193.46,6457.22
  Bottom Layer w10: v1(5320,6030) 5320,5980 5415,5885 6765,5885 P1.1
RESET: C14.1 P1.5 P2.6 P3.1 R1.1 U2.90 | length 2459.2
  Top Layer w10: v1(5107.88,6405) 5105,6405 5105,6415 5125.64,6435.64 U2.90 ; R1.1 5409.46,5802 P3.1 5486,5879.59 C14.1 ; v1(6500,5795) 6500,5820 P1.5
  Bottom Layer w10: v1(5107.88,6405) 5107.88,6231.62 5287.13,6052.36 5287.13,5959.36 5444.49,5802 P3.1 5570.87,5802 5625,5747.87 6087.87,5747.87 P2.6 6222.4,5797.6 6497.4,5797.6 v1(6500,5795)
RF-GND: C29.1 CB1.1 CB2.1 CON1.3 CON1.4 CON1.5 CON1.6 CX3.1 CX4.1 L1.1 T1.2 T1.5 T1.6 U3.1 U3.2 U3.3 U3.6 U3.27 U3.30 U3.31 U3.32 U3.33 | length 1514.4
  Top Layer w10: CX4.1 v1(6295,6233) ; U3.27@6330,6492.17 U3.27 6330.47,6565.47 U3.33 ; v1(6355,6240) 6389.41,6274.41 CX3.1 ; U3.33@6360,6561.54 U3.32 U3.32@6428.9,6491.1 ; U3.30 U3.33@6389.53,6565.47 ; U3.31 6409.21,6545.79 U3.33@6394.5,6560.5 ; CB1.1 6445.59,6399.41 v1(6460,6385) ; U3.1 U3.2@6442.68,6545.79 ; U3.3 U3.33@6389.53,6565.47 ; U3.6 6389.53,6624.53 U3.33 ; U3.2@6464.8,6543.35 U3.2 ; CB2.1 v1(6560,6530) ; v1(6630,6865) 6630,6856.21 CON1.4 ; v1(6635,6508) 6658,6508 6672,6522 T1.5 T1.5@6672,6537 ; CON1.3 6662.91,6762.91 6675,6775 v1(6700,6775) ; T1.2 v1@6672,6683 ; T1.6 6713.22,6540 v1(6731,6540) ; C29.1 v1(6760,6470) ; v1(6755,6785) 6777.09,6807.09 CON1.6 ; CON1.5 6777.09,6687.91 v1(6785,6680) ; L1.1@6825,6485 v1(6885,6485) ; U3.33 U3.33@6389.53,6565.47 ; U3.33@6394.5,6560.5 6447.65,6560.5 U3.2 ; U3.33@6394.5,6560.5 6427.96,6560.5 U3.2@6442.68,6545.79 ; U3.2@6442.68,6545.79 U3.2
  other v1: 6325,6560 6394,6560 6325,6630 6394,6630 6670,6685
RF-VCC: C26.2 CB2.2 L3.2 U3.28 | length 290.3
  Top Layer w10: U3.28 6350,6492.48 6350,6405 v1(6370,6385) ; v1(6510,6435) 6559.41,6435 CB2.2 ; v1(6525,6275) C26.2@6525,6337.6 ; v1(6840,6270) 6896.54,6270 L3.2
TS: IC1.12 R26.2 R28.2 | length 257.1
  Top Layer w10: R26.2 R28.2 4043,6220.75 4194.29,6220.75 IC1.12
U-GND: L6.1 P4.ID P4.shield P4.UGND U4.1 | length 931.5
  Top Layer w10: P4.shield@4786.1,5821.66 v1@4873.34,5821.66 ; P4.shield@4786.1,5988 4785,5989.1 P4.shield@4787.2,5989.1 ; P4.shield@4790.9,5989.1 P4.shield@4787.2,5989.1 ; 4843.23,5989.1 P4.shield@4787.2,5989.1 ; v1@4872.87,6257.87 4872.87,6167.87 4844.13,6139.13 4844.13,5974.38 4875,5943.51 v1(4875,5940) ; v1(5005,5915) 5011.5,5921.5 P4.ID P4.ID@5010,5986.5 ; P4.UGND@5042.99,5977.01 P4.UGND ; P4.UGND@5044.99,5990 P4.UGND ; v1(5050,5915) 5042.99,5922.01 P4.UGND ; v1@5091.66,5821.66 P4.shield@5173.9,5821.66 ; v1(5095,5985) 5096.9,5986.9 5175,5986.9 P4.shield@5173.9,5988 ; v1(5250,5770) 5268,5788 L6.1
  Bottom Layer w10: v1@4875,6260 4875,6258.81 U4.1
  other v1: 4875,5820 5090,5820 4873,6258
V-AC: C21.1 IC1.4 IC1.8 IC1.9 J1.2 J1.3 R25.2 | length 1200.5
  Top Layer w10: IC1.8 4372.68,6197.68 v1(4385,6210) ; IC1.9 4377.64,6217.36 4417.36,6217.36 4430,6230 4475.59,6230 C21.1 4586.54,6260 R25.2 R25.2@4584.54,6304 ; IC1.4@4342.28,6119.84 IC1.4 4383.94,6118.94 v1(4386.15,6121.15)
  Bottom Layer w10: J1.3 4297,6734 J1.2 4375,6656 4375,6220 v1(4385,6210) ; v1(4386.15,6121.15) v1@4386.15,6208.85
VBUS: C19.1 IC1.20 P4.VBUS U1.8 U4.4 | length 1805.6
  Top Layer w10: IC1.20 4239.02,5810.98 4297.87,5752.13 4662.13,5752.13 4715,5805 v1(4715,5990) ; U1.8 4937.87,6485.43 4937.87,6320 ; P4.VBUS v1(4877,5988) 4877,6042 v1(4935,6100) 4937.87,6102.87 4937.87,6320 ; C19.1 4937.87,6320
  Bottom Layer w10: v1(4715,5990) v1@4875,5990 ; U4.4 v1@4935,6104.32
VCC: C1.1 C2.1 C3.1 C4.1 C7.1 C8.1 C9.1 C10.1 C11.1 C13.1 C18.1 C23.1 C29.2 C30.2 CB4.1 F1.1 L3.1 L4.1 P1.2 P2.4 R1.2 R12.1 R13.2 R14.2 R15.2 R16.2 R17.2 R18.2 R19.2 R21.2 R22.2 U1.6 U1.7 U2.14 U2.24 U2.34 U2.44 U2.54 U2.64 U2.74 U2.83 U3.15 U5.5 U5.6 | length 4508.1
  Top Layer w10: U5.5@4339.13,6371.59 4283.41,6371.59 v1(4255,6400) 4276.59,6421.59 U5.6@4339.13,6421.59 ; v1(4340,6570) 4359.46,6589.46 R21.2@4415,6589.46 ; R18.2 4442.6,5802.6 v1(4475,5835) 4532.4,5835 4542.4,5845 4640,5845 R16.2 4585,5900.2 4585,6055 4595,6065 4695,6065 v1(4715,6045) 4757.4,6087.4 R17.2 ; v1@4757.4,6387.4 R17.2 ; R17.2@4760,6120 R17.2 ; R22.2 4815,6915 v1(4850,6880) ; U1.6 4839.37,6411.81 C18.1@4859.06,6392.13 ; U1.7 C18.1@4859.06,6392.13 ; C23.1 4889.41,6885.59 v1(4895,6880) ; v1(4900,6410) 4881.18,6391.18 C18.1 C18.1@4859.06,6392.13 ; 5000.07,6393.07 5024.25,6417.25 v1(5024.25,6418) ; F1.1 5016.54,6888.46 v1(5030,6875) ; v1(5105,6585) 5116.56,6573.44 U2.83 ; U2.74 5313.47,6747.15 5322.91,6737.72 5368.94,6737.72 v1(5385,6721.65) ; v1(5340,5845) 5348.46,5853.46 R1.2 ; v1@5492,6722 5510.32,6740.32 U2.64 ; 5549.69,6077.86 5559.13,6068.43 5585.57,6068.43 v2(5601,6053) ; v1(5690,6900) 5690,6896.86 5705.29,6881.57 U2.54@5705.29,6811.54 ; U2.24 5746.54,6073.46 v1(5770,6050) ; v1(5780.93,6396.27) U2.34 ; U2.44 5968.28,6593.12 R15.2 v1(6047.4,6577.4) ; v1(5985,6280) 6057.4,6207.6 C30.2 6105,6200 v1(6115,6210) ; v1@6057.4,6257.4 v1(6060,6260) R14.2 ; v1(6075,6850) 6097.4,6827.6 R13.2 ; L4.1 6280,6140 v1(6295,6155) ; CB4.1 v1(6265.59,6860) ; v1(6275,6770) 6275,6760 6310.79,6724.21 U3.15 ; P2.4 6280,5772.41 C8.1 ; v1(6640,6395) 6640.2,6395.2 C29.2 ; C7.1 6820,5822.41 P1.2 ; v1(6840,6335) 6898.46,6335 L3.1
  Bottom Layer w10: v1(4760,6390) 4880,6390 v1(4900,6410) v1@4907.56,6402.44 ; v1(5105,6585) 5135,6555 C11.1 ; C3.1@5305,6790 C3.1 5310,6779 5367.35,6721.65 v1(5385,6721.65) ; v1@5494,6720 5485,6729 5485,6764.41 C10.1 ; C4.1 5601,6104 v2(5601,6053) ; v1(5690,6900) 5705,6885 5705,6831.18 C2.1 ; C9.1 5761.65,6138.35 5761.65,6061.65 5770,6053.31 v1(5770,6050) ; v1(5780.93,6396.27) C1.1@5848.73,6396.27 ; C13.1 5856.48,6585 5883.13,6558.35 6028.35,6558.35 v1(6047.4,6577.4)
  other v1: 5494,6721.65
pads on no net: A1.2 J1.NC P1.3 P1.4 P2.7 P2.8 U1.3 U1.10 U1.13 U1.14 U1.15 U1.16 U1.17 U1.18 U1.19 U1.20 U1.21 U1.22 U2.1 U2.2 U2.5 U2.6 U2.7 U2.8 U2.25 U2.26 U2.27 U2.28 U2.29 U2.30 U2.31 U2.32 U2.35 U2.36 U2.37 U2.38 U2.39 U2.40 U2.41 U2.42 U2.45 U2.55 U2.56 U2.57 U2.58 U2.59 U2.60 U2.61 U2.62 U2.65 U2.66 U2.67 U2.68 U2.69 U2.70 U2.71 U2.72 U2.75 U2.76 U2.77 U2.78 U2.79 U2.80 U2.81 U2.82 U2.85 U2.86 U2.87 U2.88 U2.95 U2.96 U2.97 U2.98 U2.99 U2.100 U5.7 Xtal1.2 Xtal1.4 Xtal2.2 Xtal2.4

## Polygon pours and split planes (outlines as drawn)
GND on Internal Plane 1 (split plane): 6589.9,6675.1 6295,6675.1 6293.05,6674.71 6291.4,6673.6 6290.29,6671.95 6289.9,6670 6289.9,6575.1 6125,6575.1 6123.05,6574.71 6121.4,6573.6 6120.29,6571.95 6119.9,6570 6119.9,6476.25 6119.9,6288.75 6119.9,6195 6120.29,6193.05 6121.4,6191.4 6123.05,6190.29 6125,6189.9 6500,6189.9 6501.95,6190.29 6503.6,6191.4 6504.71,6193.05 6505.1,6195 6505.1,6434.9 6929.9,6434.9 6929.9,5670.1 5285.1,5670.1 5285.1,5800 5284.71,5801.95 5283.6,5803.6 5281.95,5804.71 5280,5805.1 5240.1,5805.1 5240.1,6070 5239.71,6071.95 5238.6,6073.6 5236.95,6074.71 5235,6075.1 4730,6075.1 4728.05,6074.71 4726.4,6073.6 4725.29,6071.95 4724.9,6070 4724.9,5670.1 3200.1,5670.1 3200.1,6929.9 4344.9,6929.9 4344.9,6865 4345.29,6863.05 4346.4,6861.4 4348.05,6860.29 4350,6859.9 4525,6859.9 4526.95,6860.29 4528.6,6861.4 4529.71,6863.05 4530.1,6865 4530.1,6929.9 5564.9,6929.9 5564.9,6690.1 5427.11,6690.1 5364.03,6753.18 5362.38,6754.28 5360.43,6754.67 5255,6754.67 5253.05,6754.28 5251.4,6753.18 5250.29,6751.52 5249.9,6749.57 5249.9,6200 5250.29,6198.05 5251.4,6196.4 5253.05,6195.29 5255,6194.9 5805,6194.9 5806.95,6195.29 5808.6,6196.4 5809.71,6198.05 5810.1,6200 5810.1,6365 5809.71,6366.95 5808.6,6368.6 5806.95,6369.71 5805,6370.1 5655.1,6370.1 5655.1,6929.9 6589.9,6929.9
RF-GND on Internal Plane 1 (split plane): 6820,6695 6929.9,6695 6929.9,6445.1 6500,6445.1 6498.05,6444.71 6496.4,6443.6 6495.29,6441.95 6494.9,6440 6495.29,6438.05 6495.66,6437.5 6495.29,6436.95 6494.9,6435 6494.9,6200.1 6130.1,6200.1 6130.1,6288.75 6130.1,6476.25 6130.1,6564.9 6295,6564.9 6296.95,6565.29 6298.6,6566.4 6299.71,6568.05 6300.1,6570 6300.1,6664.9 6595,6664.9 6596.95,6665.29 6598.6,6666.4 6599.71,6668.05 6600.1,6670 6600.1,6929.9 6820,6929.9
A-GND on Internal Plane 1 (split plane): 5644.9,6365 5645.29,6363.05 5646.4,6361.4 5648.05,6360.29 5650,6359.9 5799.9,6359.9 5799.9,6205.1 5260.1,6205.1 5260.1,6744.47 5358.32,6744.47 5421.4,6681.4 5423.05,6680.29 5425,6679.9 5570,6679.9 5571.95,6680.29 5573.6,6681.4 5574.71,6683.05 5575.1,6685 5575.1,6929.9 5644.9,6929.9
U-GND on Internal Plane 1 (split plane): 5229.9,5855 5229.9,5800 5230.29,5798.05 5231.4,5796.4 5233.05,5795.29 5235,5794.9 5274.9,5794.9 5274.9,5670.1 4735.1,5670.1 4735.1,6064.9 5229.9,6064.9
DC-GND on Internal Plane 1 (split plane): 4519.9,6870.1 4355.1,6870.1 4355.1,6929.9 4519.9,6929.9
VCC on Internal Plane 2 (split plane): 6820,6695 6929.9,6695 6929.9,6305.1 6590.1,6305.1 6590.1,6500 6589.71,6501.95 6588.6,6503.6 6586.95,6504.71 6585,6505.1 6335,6505.1 6333.05,6504.71 6331.4,6503.6 6330.29,6501.95 6329.9,6500 6329.9,6240 6330.29,6238.05 6331.4,6236.4 6333.05,6235.29 6335,6234.9 6929.9,6234.9 6929.9,5670.1 3200.1,5670.1 3200.1,6929.9 5564.9,6929.9 5564.9,6610.1 5255,6610.1 5253.05,6609.71 5251.4,6608.6 5250.29,6606.95 5249.9,6605 5249.9,6200 5250.29,6198.05 5251.4,6196.4 5253.05,6195.29 5255,6194.9 5805,6194.9 5806.95,6195.29 5808.6,6196.4 5809.71,6198.05 5810.1,6200 5810.1,6365 5809.71,6366.95 5808.6,6368.6 5806.95,6369.71 5805,6370.1 5655.1,6370.1 5655.1,6929.9 6820,6929.9
A-VCC on Internal Plane 2 (split plane): 5644.9,6365 5645.29,6363.05 5646.4,6361.4 5648.05,6360.29 5650,6359.9 5789.9,6359.9 5789.9,6205.1 5260.1,6205.1 5260.1,6599.9 5570,6599.9 5571.95,6600.29 5573.6,6601.4 5574.71,6603.05 5575.1,6605 5575.1,6929.9 5644.9,6929.9
RF-VCC on Internal Plane 2 (split plane): 6579.9,6300 6580.29,6298.05 6581.4,6296.4 6583.05,6295.29 6585,6294.9 6929.9,6294.9 6929.9,6245.1 6340.1,6245.1 6340.1,6494.9 6579.9,6494.9

## Keep-outs
Keep-Out Layer:
  lines w10: 2050,5730 6950,5730 ; 2050,6950 6950,6950 6950,3050 ; 3910,3020 3910,6920

## Other copper
Internal Plane 1 (plane layer: these items are gaps in the copper):
  rectangle: 6820,6695 6950,6950
  lines w10: 4350,6950 4350,6865 4525,6865 4525,6950 ; 4730,5650 4730,6070 4875,6070 5000,6070 5130,6070 5235,6070 ; 5235,5855 5235,6070 ; 5280,5650 5280,5800 5235,5800 5235,6070 ; 5570,6965 5570,6685 5491.25,6685 5425,6685 5360.43,6749.57 5317.61,6749.57 5269.18,6749.57 5255,6749.57 5255,6200 5650,6200 5805,6200 5805,6365 5650,6365 5650,6950 ; 6500,6435 6500,6195 6125,6195 6125,6288.75 6125,6476.25 6125,6570 6295,6570 6295,6670 6415,6670 6595,6670 6595,6950 ; 6500,6440 6950,6440
Internal Plane 2 (plane layer: these items are gaps in the copper):
  rectangle: 6820,6695 6950,6950
  lines w10: 5515,6950 5540,6950 ; 5570,6965 5570,6605 5255,6605 5255,6200 5635,6200 5805,6200 ; 5650,6200 5805,6200 ; 5650,6955 5650,6365 5805,6365 ; 5775,6365 5805,6365 ; 5795,6200 5795,6365 ; 6950,6240 6335,6240 6335,6500 6585,6500 6585,6300 6950,6300 ; 5805,6200 5805,6365 ; 5805,6200 5805,6365

## Text inside footprints (layer, text, board x,y; h text height)
CON1: Top Overlay "OUT" at 6725.96,6798.64 h7.87 r90; Top Overlay "IN" at 6726.19,6740.55 h7.87 r90
P1: Top Overlay "6" at 6560,5860 h50 r180; Top Overlay "5" at 6560,5960 h50 r180; Top Overlay "2" at 6920,5860 h50 r180; Top Overlay "1" at 6900,5960 h50 r180
P2: Top Overlay "2" at 6480,5860 h50 r180; Top Overlay "1" at 6460,5960 h50 r180; Top Overlay "9" at 5920,5960 h50 r180